# Altium PCB _PCB_4L.PcbDoc
Units mm, origin at the board's own origin, x right, y up, seen from the top; angles counter-clockwise.
Board outline 75 x 100 mm, 4 copper layers (Top Layer, Internal Plane 1, Signal Layer 1, Bottom Layer), stack 1.6 mm thick; 12 components, 1 nets, 12 pads, 0 vias.
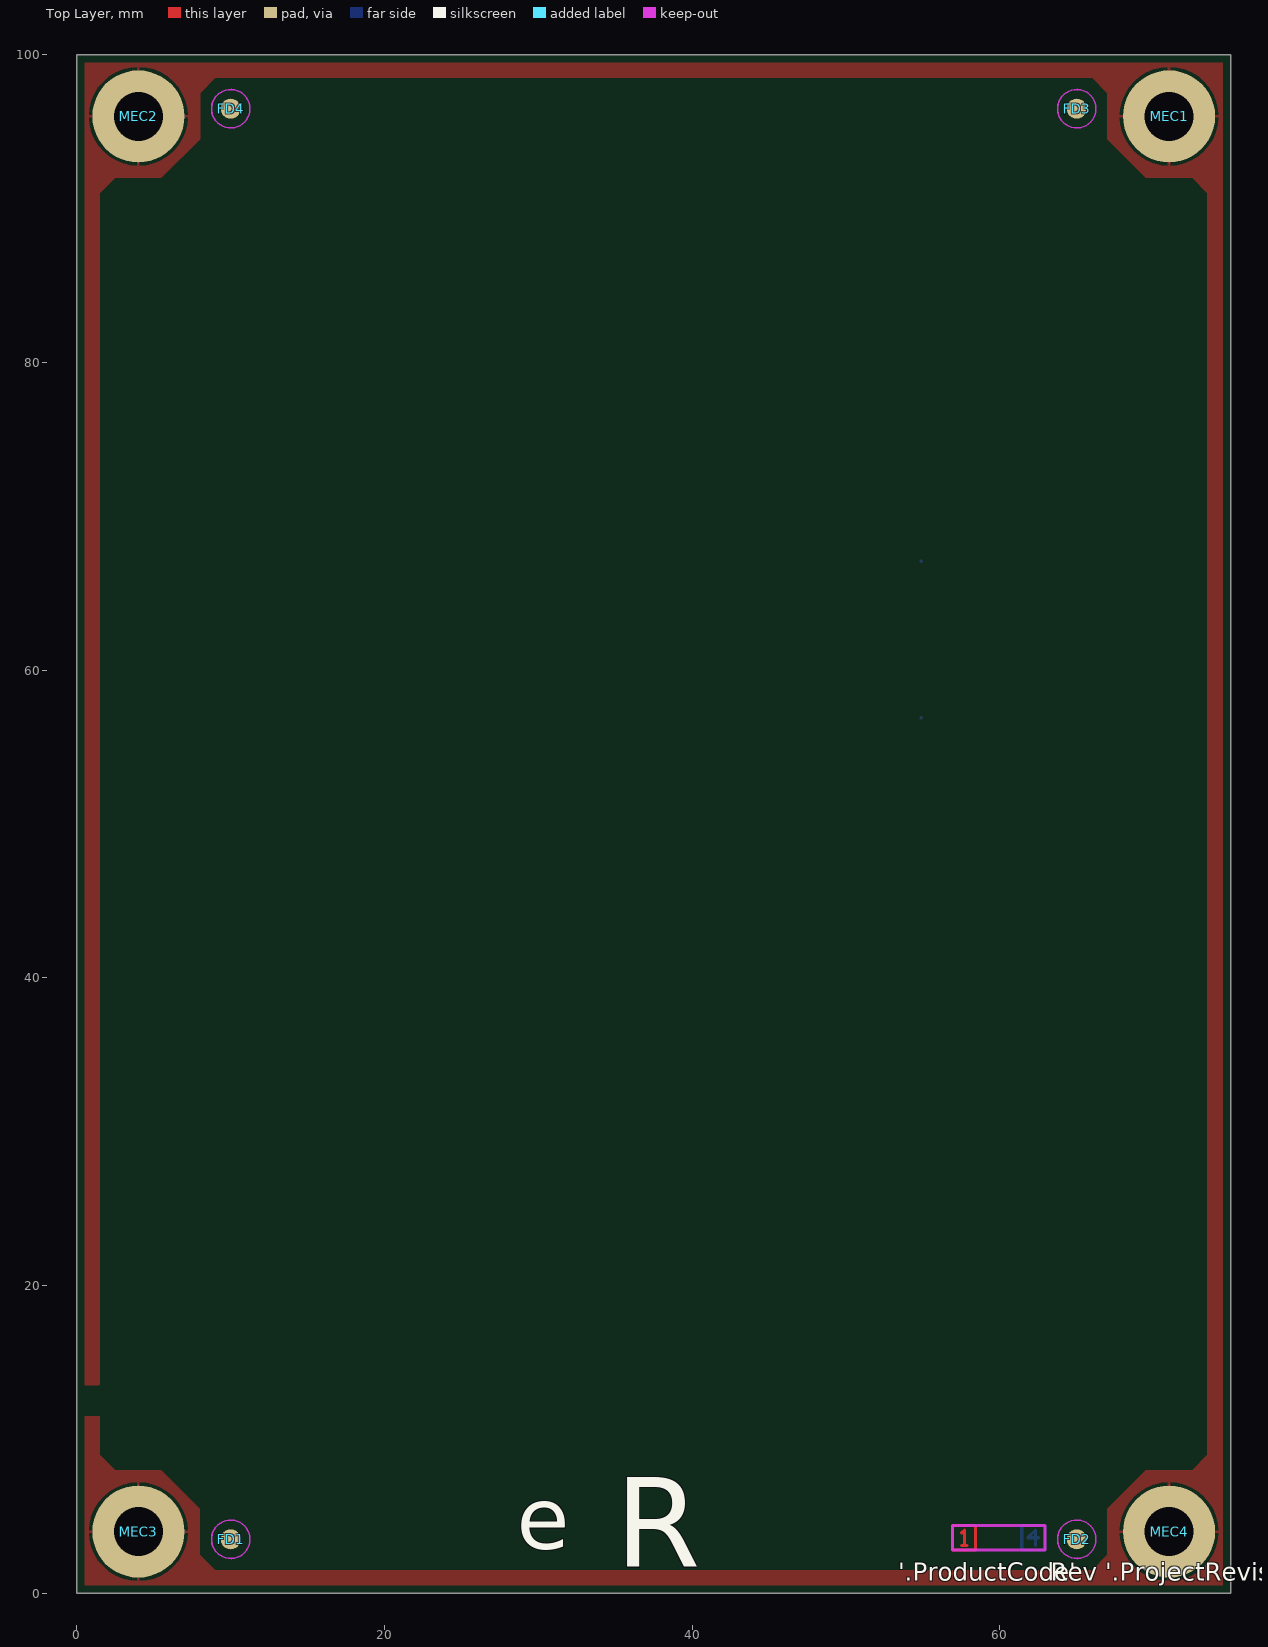
[diagram p0: Top Layer view]
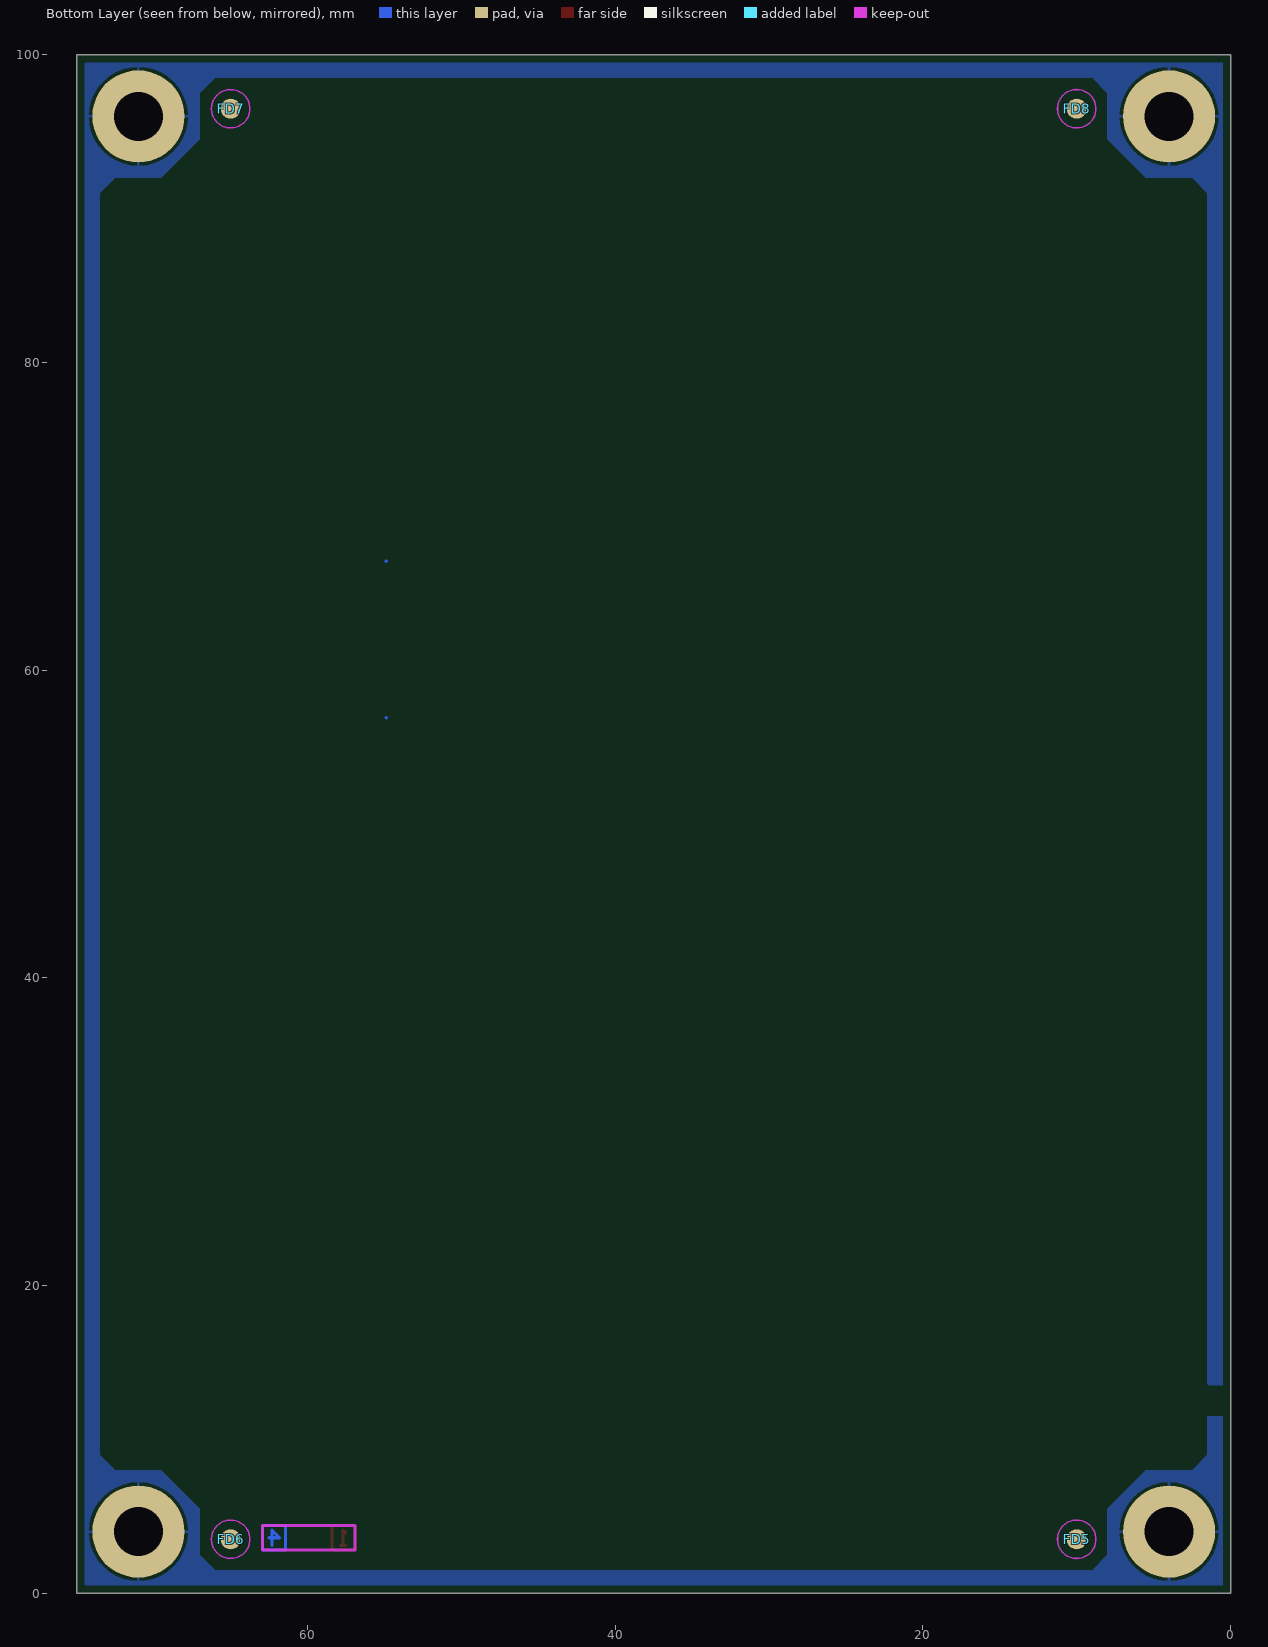
[diagram p1: Bottom Layer view, seen from below]
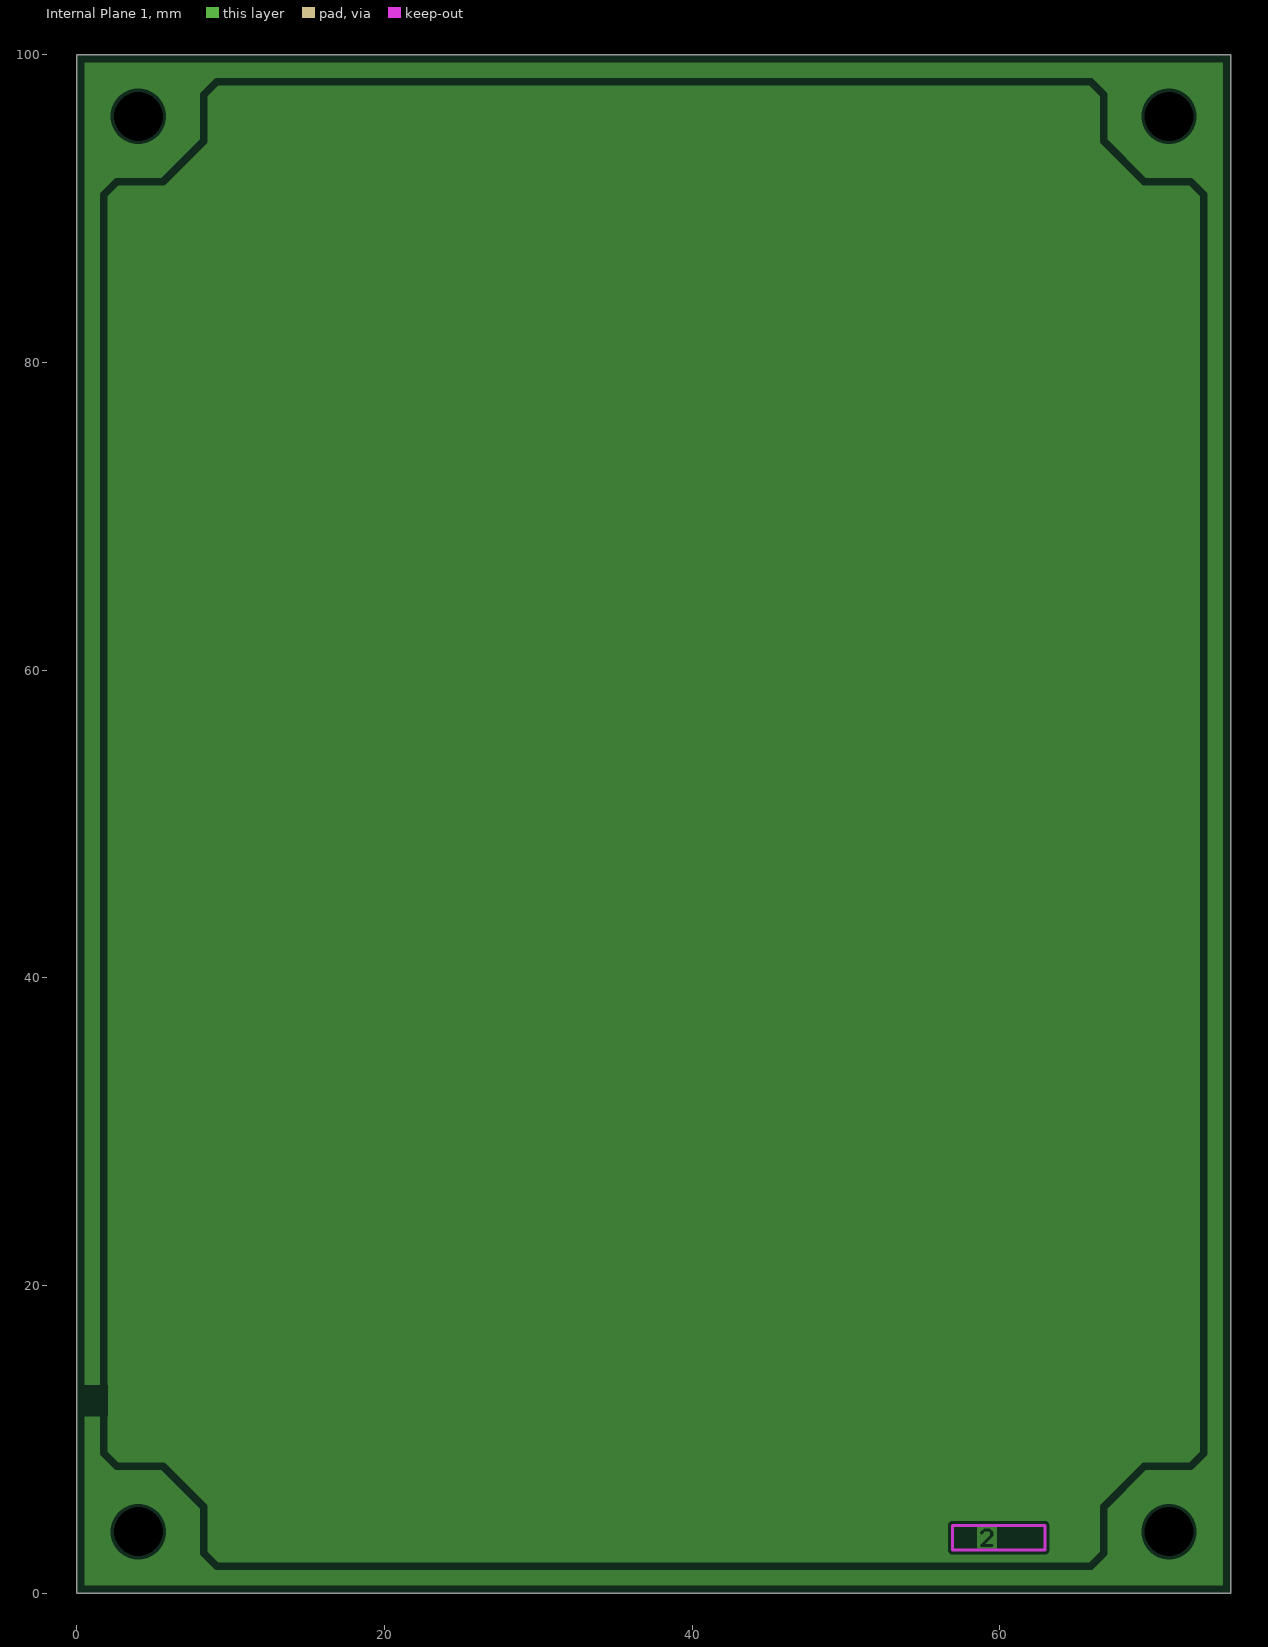
[diagram p2: Internal Plane 1, clearances drawn from the general rule]
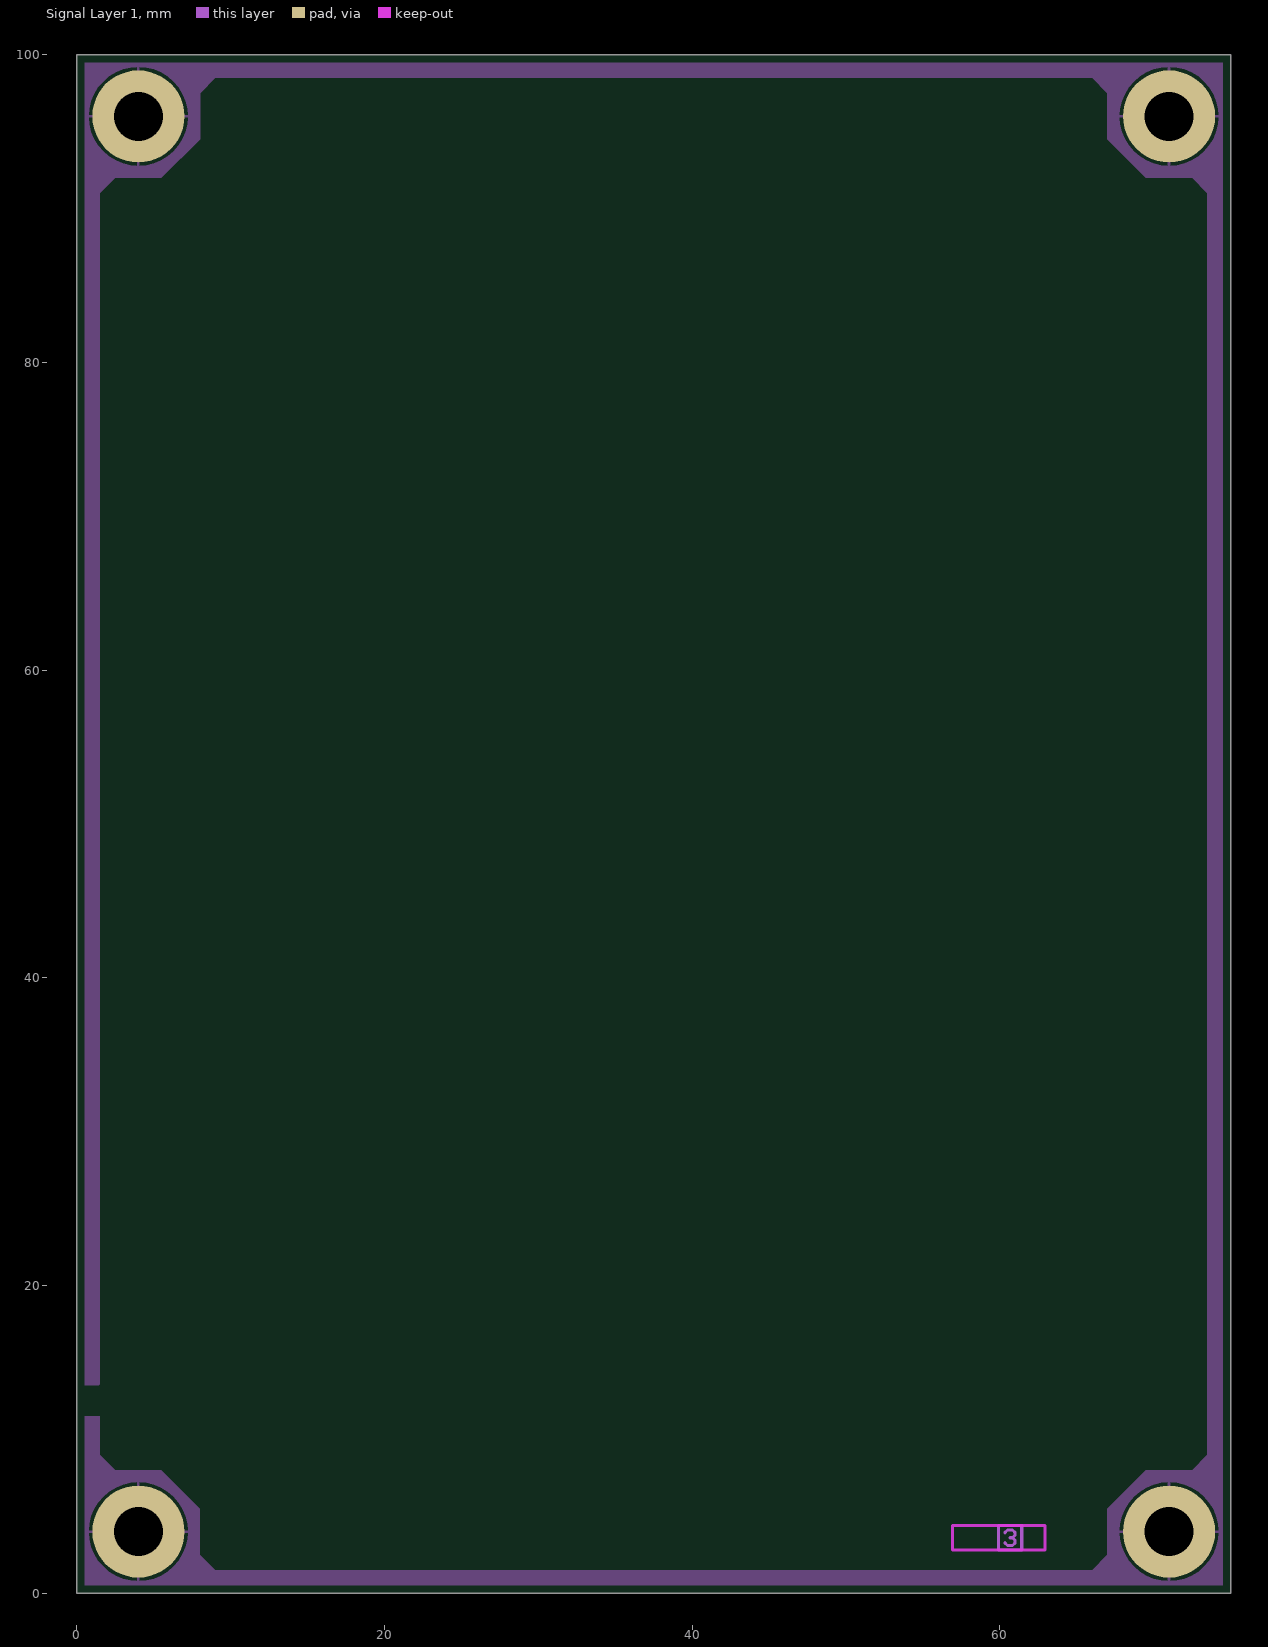
[diagram p3: Signal Layer 1]

## Layer stack, top to bottom
Top Solder: solder mask 0.013, Solder Resist, Dk 3.3
Top Layer: signal copper 0.035
Dielectric 1: prepreg 0.13, FR-4, Dk 4.2
Internal Plane 1: plane copper 0.035
Dielectric 2: core 1.2, FR-4, Dk 4.2
Signal Layer 1: signal copper 0.035
Dielectric 3: prepreg 0.13, FR-4, Dk 4.2
Bottom Layer: signal copper 0.035
Bottom Solder: solder mask 0.013, Solder Resist, Dk 3.3

## Board outline
0,0 75,0 75,100 0,100

## Design rules (kind name [scope] priority, off if disabled: settings)
BoardOutlineClearance BoardOutlineClearance_layers [WithinRoom('layers_room')] p1: gap=0 ignorepadtopadclearanceinfootprint=FALSE
BoardOutlineClearance [All] p2: gap=0.5 ignorepadtopadclearanceinfootprint=FALSE
Clearance EARTH_Clearance [InNet('EARTH')] p1: gap=0.5 ignorepadtopadclearanceinfootprint=TRUE
Clearance [All] p2: gap=0.2 ignorepadtopadclearanceinfootprint=TRUE
DiffPairsRouting Diff_100ohmDiffPairsRouting [InDifferentialPairClass('Diff_100ohm')] p1: maxlimit=0.2 minlimit=0.2 mostfreqgap=0.2 toplayer_minwidth=0.16 toplayer_maxwidth=0.16 toplayer_prefwidth=0.16 midlayer1_minwidth=0.16 midlayer1_maxwidth=0.16 midlayer1_prefwidth=0.16 bottomlayer_minwidth=0.16 bottomlayer_maxwidth=0.16 bottomlayer_prefwidth=0.16 maxuncoupledlength=12.7
DiffPairsRouting Diff_90ohmDiffPairsRouting [InDifferentialPairClass('Diff_90ohm')] p2: maxlimit=0.2 minlimit=0.2 mostfreqgap=0.2 toplayer_minwidth=0.2 toplayer_maxwidth=0.2 toplayer_prefwidth=0.2 midlayer1_minwidth=0.2 midlayer1_maxwidth=0.2 midlayer1_prefwidth=0.2 bottomlayer_minwidth=0.2 bottomlayer_maxwidth=0.2 bottomlayer_prefwidth=0.2 maxuncoupledlength=5
DiffPairsRouting [All] p3: maxlimit=0.2 minlimit=0.2 mostfreqgap=0.2 toplayer_minwidth=0.16 toplayer_maxwidth=0.3 toplayer_prefwidth=0.2 midlayer1_minwidth=0.16 midlayer1_maxwidth=0.3 midlayer1_prefwidth=0.2 bottomlayer_minwidth=0.16 bottomlayer_maxwidth=0.3 bottomlayer_prefwidth=0.2 maxuncoupledlength=12.7
HoleSize [All] p1: absolutevalues=TRUE maxlimit=6 minlimit=0.2 maxpercent=80.000 minpercent=20.000
HoleToHoleClearance [All] p1: gap=0.25 allowstackedmicrovias=TRUE
MatchedLengths ETH_iterpair_skew [InNetClass('ETH')] p1: tolerance=1.2 checknetsindiffpair=FALSE checkdiffpairvsdiffpair=TRUE checkxsignals=TRUE checkothers=TRUE
MatchedLengths GETH_interpair_skew [InNetClass('GETH')] p2: tolerance=15.2 checknetsindiffpair=FALSE checkdiffpairvsdiffpair=TRUE checkxsignals=TRUE checkothers=TRUE
MatchedLengths Diff_100ohm_intrapair_skew [InDifferentialPairClass('Diff_100ohm')] p3: tolerance=1.2 checknetsindiffpair=TRUE checkdiffpairvsdiffpair=FALSE checkxsignals=FALSE checkothers=FALSE
MatchedLengths Diff_90ohm_intrapair_skew [InDifferentialPairClass('Diff_90ohm')] p4: tolerance=1.2 checknetsindiffpair=TRUE checkdiffpairvsdiffpair=FALSE checkxsignals=FALSE checkothers=FALSE
MinimumSolderMaskSliver [All] p1: minsoldermaskwidth=0.01
PlaneClearance [All] p1: clearance=0.2
PlaneConnect [All] p1: pad.planeconnectstyle=Relief pad.reliefexpansion=0.2 pad.reliefentries=4 pad.reliefconductorwidth=0.2 pad.reliefairgap=0.2 via.planeconnectstyle=Direct via.reliefexpansion=0.2 via.reliefentries=4 via.reliefconductorwidth=0.2 via.reliefairgap=0.2
PolygonConnect [All] p1: thpad.connectstyle=Relief thpad.reliefconductorwidth=0.2 thpad.reliefentries=4 thpad.polygonreliefangle="90 Angle" thpad.airgapwidth=0.2 smdpad.connectstyle=Relief smdpad.reliefconductorwidth=0.2 smdpad.reliefentries=4 smdpad.polygonreliefangle="90 Angle" smdpad.airgapwidth=0.2 via.connectstyle=Direct via.reliefconductorwidth=0.2 via.reliefentries=4 via.polygonreliefangle="90 Angle" via.airgapwidth=0.2
RoomDefinition layers_room [All] p1: confinementstyle=ConfineOut formatcopy=TRUE lockcomponents=FALSE outline 173.5,-27.6 193.3,-27.6 193.3,-31.5 173.5,-31.5
RoutingVias [All] p1: holewidth=0.3 width=0.5 viastyle="Through Hole" minholewidth=0.2 minwidth=0.4 maxholewidth=1 maxwidth=1.6
SilkToSilkClearance [All] p1: silktosilkclearance=0.08
SilkToSolderMaskClearance [IsPad] p1: minsilkscreentomaskgap=0.06 clearancetoexposedcopper=TRUE
SolderMaskExpansion [All] p1: expansion=0.1
Width [All] p1: maxlimit=6 minlimit=0.16 preferedwidth=0.2
22 further rules are at their usual default settings.

## Classes and differential pairs
differential pair class Diff_100ohm: ETH_CONRX ETH_CONTX ETH_RJRX ETH_RJTX ETH_RX ETH_TX TXRX_A TXRX_B TXRX_C TXRX_D
differential pair class Diff_90ohm: USB0_D USB1_OTG_D

## Components (designator, comment, footprint, x,y, rotation, side; value= is the part's Value field where it differs from the comment)
FD1 "Fiducial 1.3" "Fiducial 1.3mm" 10,3.5 r0 top
FD2 "Fiducial 1.3" "Fiducial 1.3mm" 65,3.5 r270 top
FD3 "Fiducial 1.3" "Fiducial 1.3mm" 65,96.5 r270 top
FD4 "Fiducial 1.3" "Fiducial 1.3mm" 10,96.5 r0 top
FD5 "Fiducial 1.3" "Fiducial 1.3mm" 10,3.5 r180 bottom
FD6 "Fiducial 1.3" "Fiducial 1.3mm" 65,3.5 r180 bottom
FD7 "Fiducial 1.3" "Fiducial 1.3mm" 65,96.5 r270 bottom
FD8 "Fiducial 1.3" "Fiducial 1.3mm" 10,96.5 r180 bottom
MEC1 "M3" "M3 hole" 71,96 r0 top
MEC2 "M3" "M3 hole" 4,96 r0 top
MEC3 "M3" "M3 hole" 4,4 r0 top
MEC4 "M3" "M3 hole" 71,4 r0 top

## Footprints (in the part's own frame and the unit in brackets; to place one, negate y for a bottom-side part, rotate by r counter-clockwise, add the part's x,y. Pads: shape width x height; smd on the part's side, far side on the other; paste and mask are expansions set on the pad)
"Fiducial 1.3mm" [mm]
  round 1.3 smd mask+0.6: FD0(0,0)
  Top Layer keep-out circle w0.1: c0,0 r1.25
"M3 hole" [mm]
  round 6 hole 3.2: 0(0,0)

## Part data
FD1 FD2 FD3 FD4 FD5 FD6 FD7 FD8: "Fiducial 1.3mm"
MEC1 MEC2 MEC3 MEC4: library part "M3 hole", "M3 hole"

## Nets (pads, with @x,y where several pads share a name; then routed paths per layer and width w, separated by ;. In a path a pad name is that pad's centre, name@x,y a point inside that pad or via, vN(x,y) a via of type N, cw(c..) or ccw(c..) an arc to the next point about the centre after c; other vN are vias at no path point)
EARTH: MEC1.0 MEC2.0 MEC3.0 MEC4.0
pads on no net: FD1.FD0 FD2.FD0 FD3.FD0 FD4.FD0 FD5.FD0 FD6.FD0 FD7.FD0 FD8.FD0
copper on no net: | length 25.2
  Top Layer w0.2: 57.525,3.1 57.7,3.1 ; 57.525,3.925 57.7,4.1 57.7,3.1 ; 57.875,3.1 57.7,3.1 ; 56.925,2.8 56.925,4.4 58.425,4.4 58.425,2.8 56.925,2.8
  Signal Layer 1 w0.2: 60.325,3.275 60.5,3.1 60.825,3.1 61,3.275 61,3.425 60.825,3.6 ; 60.325,3.925 60.5,4.1 60.825,4.1 61,3.925 61,3.775 60.825,3.6 ; 60.65,3.6 60.825,3.6 ; 59.925,2.8 61.425,2.8 61.425,4.4 59.925,4.4 59.925,2.8
  Bottom Layer w0.2: 54.88,56.904 54.896,56.92 ; 54.88,67.096 54.896,67.08 ; 62.325,3.1 62.325,4.1 61.825,3.6 62.5,3.6 ; 61.425,2.8 62.925,2.8 62.925,4.4 61.425,4.4 61.425,2.8

## Polygon pours and split planes (outlines as drawn)
EARTH on Top Layer "EARTH_top" (solid, remove dead copper, pour order 10): 0,100 75,100 75,0 0,0 0,11.5 1.499,11.5 1.501,8.999 2.5,8 5.5,8 8,5.5 8,2.5 9,1.5 66,1.5 67,2.5 67,5.5 69.5,8 72.5,8 73.5,9 73.5,91 72.499,92.001 69.499,92.001 67,94.5 67,97.5 66.005,98.5 9,98.5 8.009,97.509 8.009,94.509 5.5,92 2.5,92 1.501,91.001 1.501,13.5 0,13.5
EARTH on Signal Layer 1 "EARTH_sig1" (solid, remove dead copper, pour order 44): 0,100 75,100 75,0 0,0 0,11.5 1.499,11.5 1.501,8.999 2.5,8 5.5,8 8,5.5 8,2.5 9,1.5 66,1.5 67,2.5 67,5.5 69.5,8 72.5,8 73.5,9 73.5,91 72.499,92.001 69.499,92.001 67,94.5 67,97.5 66.005,98.5 9,98.5 8.009,97.509 8.009,94.509 5.5,92 2.5,92 1.501,91.001 1.501,13.5 0,13.5
EARTH on Bottom Layer "EARTH_bot" (solid, remove dead copper, pour order 46): 0,100 75,100 75,0 0,0 0,11.5 1.499,11.5 1.501,8.999 2.5,8 5.5,8 8,5.5 8,2.5 9,1.5 66,1.5 67,2.5 67,5.5 69.5,8 72.5,8 73.5,9 73.5,91 72.499,92.001 69.499,92.001 67,94.5 67,97.5 66.005,98.5 9,98.5 8.009,97.509 8.009,94.509 5.5,92 2.5,92 1.501,91.001 1.501,13.5 0,13.5
no net on Internal Plane 1 (split plane): 74.498,0.502 0.502,0.502 0.502,11.498 1.498,11.498 1.498,9.1 1.506,9.035 1.532,8.974 1.572,8.922 2.422,8.072 2.444,8.054 2.474,8.032 2.535,8.006 2.6,7.998 5.496,7.998 7.998,5.496 7.998,2.6 8.006,2.535 8.032,2.474 8.072,2.422 8.922,1.572 8.974,1.532 9.035,1.506 9.1,1.498 65.9,1.498 65.965,1.506 66.026,1.532 66.078,1.572 66.928,2.422 66.968,2.474 66.994,2.535 67.002,2.6 67.002,5.496 69.504,7.998 72.4,7.998 72.465,8.006 72.526,8.032 72.578,8.072 73.428,8.922 73.468,8.974 73.494,9.035 73.502,9.1 73.502,90.9 73.494,90.965 73.468,91.026 73.428,91.078 72.578,91.928 72.526,91.968 72.465,91.994 72.4,92.002 69.504,92.002 67.002,94.504 67.002,97.4 66.994,97.465 66.968,97.526 66.928,97.578 66.078,98.428 66.026,98.468 65.965,98.494 65.9,98.502 9.1,98.502 9.035,98.494 8.974,98.468 8.922,98.428 8.072,97.578 8.032,97.526 8.006,97.465 7.998,97.4 7.998,94.504 5.496,92.002 2.6,92.002 2.535,91.994 2.474,91.968 2.422,91.928 1.572,91.078 1.532,91.026 1.506,90.965 1.498,90.9 1.498,13.502 0.502,13.502 0.502,99.498 74.498,99.498
no net on Internal Plane 1 (split plane): 66.498,97.296 66.498,94.4 66.506,94.335 66.532,94.274 66.572,94.222 69.222,91.572 69.274,91.532 69.335,91.506 69.4,91.498 72.296,91.498 72.998,90.796 72.998,9.204 72.296,8.502 69.4,8.502 69.335,8.494 69.274,8.468 69.244,8.446 69.222,8.428 66.572,5.778 66.532,5.726 66.506,5.665 66.498,5.6 66.498,2.704 65.796,2.002 9.204,2.002 8.502,2.704 8.502,5.6 8.494,5.665 8.468,5.726 8.446,5.756 8.428,5.778 5.778,8.428 5.726,8.468 5.665,8.494 5.6,8.502 2.704,8.502 2.002,9.204 2.002,11.75 2,11.766 2,13.234 2.002,13.25 2.002,90.796 2.704,91.498 5.6,91.498 5.665,91.506 5.726,91.532 5.778,91.572 8.428,94.222 8.468,94.274 8.494,94.335 8.502,94.4 8.502,97.296 9.204,97.998 65.796,97.998
no net on Internal Plane 1 (split plane): 59.823,2.902 58.527,2.902 58.527,4.298 59.823,4.298

## Keep-outs
Keep-Out Layer:
  lines w0.2: 56.925,2.8 56.925,4.4 62.925,4.4 62.925,2.8 56.925,2.8
  text "'.Layer_Name'" at 174.2,-30.55 h2.5

## Other copper
Top Layer:
  text "'.Layer_Name'" at 174.2,-30.55 h2.5
Signal Layer 1:
  text "'.Layer_Name'" at 174.2,-30.55 h2.5
Bottom Layer:
  text "'.Layer_Name'" at 174.2,-30.55 h2.5
Internal Plane 1 (plane layer: these items are gaps in the copper):
  rectangle: -0.5,11.5 2,13.5
  rectangle: 56.825,2.6 58.425,4.6
  region: 63.025,4.6 59.925,4.6 59.925,2.6 63.025,2.6
  lines w0.2: 59.475,3.1 58.825,3.1 59.475,3.75 ; 58.825,3.925 59,4.1 59.325,4.1 59.475,3.95 59.475,3.75 ; 58.825,3.925 58.825,3.925 ; 59.475,3.75 59.475,3.75 ; 56.725,2.8 ccw(c56.925,2.8) 56.925,2.6 62.925,2.6 ccw(c62.925,2.8) 63.125,2.8 63.125,4.4 ccw(c62.925,4.4) 62.925,4.6 56.925,4.6 ccw(c56.925,4.4) 56.725,4.4 56.725,2.8 ; 58.425,2.8 59.925,2.8 59.925,4.4 58.425,4.4 58.425,2.8
  lines w0.5: 0,11.75 1.75,11.75 1.75,9.1 2.6,8.25 5.6,8.25 8.25,5.6 8.25,2.6 9.1,1.75 65.9,1.75 66.75,2.6 66.75,5.6 69.4,8.25 72.4,8.25 73.25,9.1 73.25,90.9 72.4,91.75 69.4,91.75 66.75,94.4 66.75,97.4 65.9,98.25 9.1,98.25 8.25,97.4 8.25,94.4 5.6,91.75 2.6,91.75 1.75,90.9 1.75,13.25 0.5,13.25
  text "'.Layer_Name'" at 174.2,-30.55 h2.5

## Silkscreen, mask and mechanical layers (free items; w line width, h text height)
Top Overlay:
  text "e" at 28.6,1.531 h7
  text "'.ProductCode'" at 53.4,0.4 h2
  text "Rev '.ProjectRevision'" at 63.3,0.4 h2
  text "R" at 35,-0.2 h10
  text "'.Layer_Name'" at 174.2,-30.55 h2.5
Bottom Overlay:
  text "'.Layer_Name'" at 174.2,-30.55 h2.5
Top Paste:
  text "'.Layer_Name'" at 174.2,-30.55 h2.5
Bottom Paste:
  text "'.Layer_Name'" at 174.2,-30.55 h2.5
Top Solder:
  rectangle: 56.725,2.6 63.125,4.6
  lines w0.2: 56.725,2.8 ccw(c56.925,2.8) 56.925,2.6 62.925,2.6 ccw(c62.925,2.8) 63.125,2.8 63.125,4.4 ccw(c62.925,4.4) 62.925,4.6 56.925,4.6 ccw(c56.925,4.4) 56.725,4.4 56.725,2.8
  text "'.Layer_Name'" at 174.2,-30.55 h2.5
Bottom Solder:
  rectangle: 56.725,2.6 63.125,4.6
  lines w0.2: 56.725,2.8 ccw(c56.925,2.8) 56.925,2.6 62.925,2.6 ccw(c62.925,2.8) 63.125,2.8 63.125,4.4 ccw(c62.925,4.4) 62.925,4.6 56.925,4.6 ccw(c56.925,4.4) 56.725,4.4 56.725,2.8
  text "p" at 32.5,2.5 h4
  text "'.Layer_Name'" at 174.2,-30.55 h2.5
Drill Guide:
  text "'.Layer_Name'" at 174.2,-30.55 h2.5
Board Edge:
  the board outline again, w0.2
Dimension:
  text "'.Layer_Name'" at 174.2,-30.55 h2.5
Route Tool:
  text "'.Layer_Name'" at 174.2,-30.55 h2.5
3D Body:
  text "'.Layer_Name'" at 174.2,-30.55 h2.5
Mechanical 8:
  text "'.Layer_Name'" at 174.2,-30.55 h2.5
Component Guard:
  text "'.Layer_Name'" at 174.2,-30.55 h2.5
Sheet:
  drawing of 457 lines, arcs and shapes, not listed
  text "1" at 5.246,142.611 h1.78
  text "2" at 77.89,142.611 h1.78
  text "3" at 151.042,142.611 h1.78
  text "4" at 223.94,142.611 h1.78
  text "Specifications" at 216.106,136.704 h1.52
  text "Material" at 193.881,134.101 h1.52
  text "Process" at 203.66,134.101 h1.52
  text "PCB" at 215.598,134.101 h1.52
  text "Silk" at 235.093,134.101 h1.52
  text "Mask" at 244.427,134.101 h1.52
  text "Copper" at 225.381,134.095 h1.52
  text "CEM" at 194.897,131.688 h1.52
  text "H.A.L." at 204.676,131.688 h1.52
  text "1,0mm" at 216.551,131.688 h1.52
  text "17um" at 226.33,131.688 h1.52
  text "LC" at 236.172,131.688 h1.52
  text "LC" at 245.507,131.688 h1.52
  text "FR-2" at 194.897,129.91 h1.52
  text "LeadFree" at 204.676,129.91 h1.52
  text "35um" at 226.33,129.91 h1.52
  text "LS" at 236.172,129.91 h1.52
  text "LS" at 245.507,129.91 h1.52
  text "1,6mm" at 216.589,129.892 h1.52
  text "FR-4" at 194.897,128.132 h1.52
  text "Flash G." at 204.676,128.132 h1.52
  text "70um" at 226.33,128.132 h1.52
  text "LC/LS" at 236.172,128.132 h1.52
  text "LC/LS" at 245.507,128.132 h1.52
  text "2,4mm" at 216.589,127.987 h1.52
  text "Spec." at 194.897,126.354 h1.52
  text "Spec." at 204.676,126.354 h1.52
  text "Spec." at 226.33,126.354 h1.52
  text "Spec." at 216.589,126.209 h1.52
  text "Color" at 235.093,125.782 h1.52
  text "Color" at 244.427,125.782 h1.52
  text "ACCORDING STACK UP" at 203.533,123.727 h1.27
  text "Special:" at 193.818,123.699 h1.52
  text "White" at 236.172,123.687 h1.52
  text "Green" at 245.443,123.687 h1.52
  text "Yellow" at 236.172,121.909 h1.52
  text "Blue" at 245.443,121.909 h1.52
  text "Tolerance:" at 193.818,121.21 h1.52
  text "Holes +-0,1mm" at 206.264,121.21 h1.52
  text "Espec." at 236.172,120.131 h1.52
  text "Espec." at 245.443,120.131 h1.52
  text "A" at -29.095,119.599 h1.78
  text "A" at 257.925,119.599 h1.78
  text "Mechanical +-0,2mm" at 206.264,119.496 h1.52
  text "Layer" at 137.707,113.571 h1.52
  text "Name" at 148.119,113.571 h1.52
  text "Material" at 174.02,113.571 h1.52
  text "Thickness" at 195.858,113.571 h1.52
  text "Constant" at 212.364,113.571 h1.52
  text "Board Layer Stack" at 226.838,113.571 h1.52
  text "Top Overlay" at 148.119,110.523 h1.52
  text "Top Solder" at 148.119,107.475 h1.52
  text "Solder Resist" at 174.02,107.475 h1.52
  text "0.013mm" at 195.858,107.475 h1.52
  text "3.3" at 212.364,107.475 h1.52
  text "1" at 137.707,104.427 h1.52
  text "Top Layer" at 148.119,104.427 h1.52
  text "Copper" at 174.02,104.427 h1.52
  text "0.035mm" at 195.858,104.427 h1.52
  text "Dielectric 1" at 148.119,101.379 h1.52
  text "FR-4" at 174.02,101.379 h1.52
  text "0.130mm" at 195.858,101.379 h1.52
  text "4.2" at 212.364,101.379 h1.52
  text "2" at 137.707,98.331 h1.52
  text "Internal Plane 1" at 148.119,98.331 h1.52
  text "Copper" at 174.02,98.331 h1.52
  text "0.035mm" at 195.858,98.331 h1.52
  text "Dielectric 2" at 148.119,95.283 h1.52
  text "FR-4" at 174.02,95.283 h1.52
  text "1.200mm" at 195.858,95.283 h1.52
  text "4.2" at 212.364,95.283 h1.52
  text "3" at 137.707,92.235 h1.52
  text "Signal Layer 1" at 148.119,92.235 h1.52
  text "Copper" at 174.02,92.235 h1.52
  text "0.035mm" at 195.858,92.235 h1.52
  text "Dielectric 3" at 148.119,89.187 h1.52
  text "FR-4" at 174.02,89.187 h1.52
  text "0.130mm" at 195.858,89.187 h1.52
  text "4.2" at 212.364,89.187 h1.52
  text "4" at 137.707,86.139 h1.52
  text "Bottom Layer" at 148.119,86.139 h1.52
  text "Copper" at 174.02,86.139 h1.52
  text "0.035mm" at 195.858,86.139 h1.52
  text "Bottom Solder" at 148.119,83.091 h1.52
  text "Solder Resist" at 174.02,83.091 h1.52
  text "0.013mm" at 195.858,83.091 h1.52
  text "3.3" at 212.364,83.091 h1.52
  text "Bottom Overlay" at 148.119,80.043 h1.52
  text "B" at -29.095,71.542 h1.78
  text "B" at 257.925,71.542 h1.78
  text "C" at -29.095,23.028 h1.78
  text "C" at 257.925,23.028 h1.78
  text "***" at 167,-21 h3.5
  text "D" at -29.095,-24.978 h1.78
  text "D" at 257.925,-24.978 h1.78
  text "Project:" at 167,-25.5 h2.5
  text "*" at 175,-25.5 h2.5
  text "Layer:" at 167,-30.5 h2.5
  text "Engineer:" at 167,-35.5 h2.5
  text "*" at 177,-35.5 h2.5
  text "Project Code:" at 225,-35.5 h2.5
  text ".ProductCode" at 239.5,-35.5 h2.5
  text "Date:" at 167,-40.5 h2.5
  text "'.Print_Date'" at 173,-40.5 h2.5
  text "Revision:" at 196,-40.5 h2.5
  text "'.ProjectRevision'" at 206,-40.5 h2.5
  text "Size:" at 225,-40.5 h2.5
  text "A4" at 231,-40.5 h2.5
  text "1" at 5.246,-45.349 h1.78
  text "2" at 77.89,-45.349 h1.78
  text "3" at 151.042,-45.349 h1.78
  text "4" at 223.94,-45.349 h1.78
Drill Drawing:
  lines w0.254: 113.935,70.523 115.628,70.523 115.628,72.217 113.935,72.217 113.935,70.523
  lines w0.381: 112.416,69.38 253.5,69.38 ; 112.416,73.19 253.5,73.19 ; 126.408,65.57 126.408,77 ; 138.597,65.57 138.597,77 ; 167.798,65.57 167.798,77 ; 180.648,65.57 180.648,77 ; 199.286,65.57 199.286,77 ; 237.375,65.57 237.375,77 ; 112.416,65.57 253.5,65.57 253.5,77 112.416,77 112.416,65.57
  text "Symbol" at 114.702,74.333 h1.83
  text "Count" at 127.551,74.333 h1.83
  text "Hole Size" at 139.74,74.333 h1.83
  text "Plated" at 168.941,74.333 h1.83
  text "Hole Type" at 181.791,74.333 h1.83
  text "Drill Layer Pair" at 200.429,74.333 h1.83
  text "Via/Pad" at 238.518,74.333 h1.83
  text "4" at 127.551,70.523 h1.52
  text "3.200mm (125.98mil)" at 139.74,70.523 h1.52
  text "PTH" at 168.941,70.523 h1.52
  text "Round" at 181.791,70.523 h1.52
  text "Top Layer - Bottom Layer" at 200.429,70.523 h1.52
  text "Pad" at 238.518,70.523 h1.52
  text "4 Total" at 127.551,66.713 h1.52
  text "'.Layer_Name'" at 174.2,-30.55 h2.5
  text "'.Layer_Name'" at 174.2,-30.55 h2.5

## Dimensions
4,4 to 4,96 on Dimension
4,4 to 71,4 on Dimension
0,100 to 0,0 on Dimension
0,100 to 75,100 on Dimension